# EAGLE board Orbiter_RING_V4_0 (EAGLE 9.0.1)
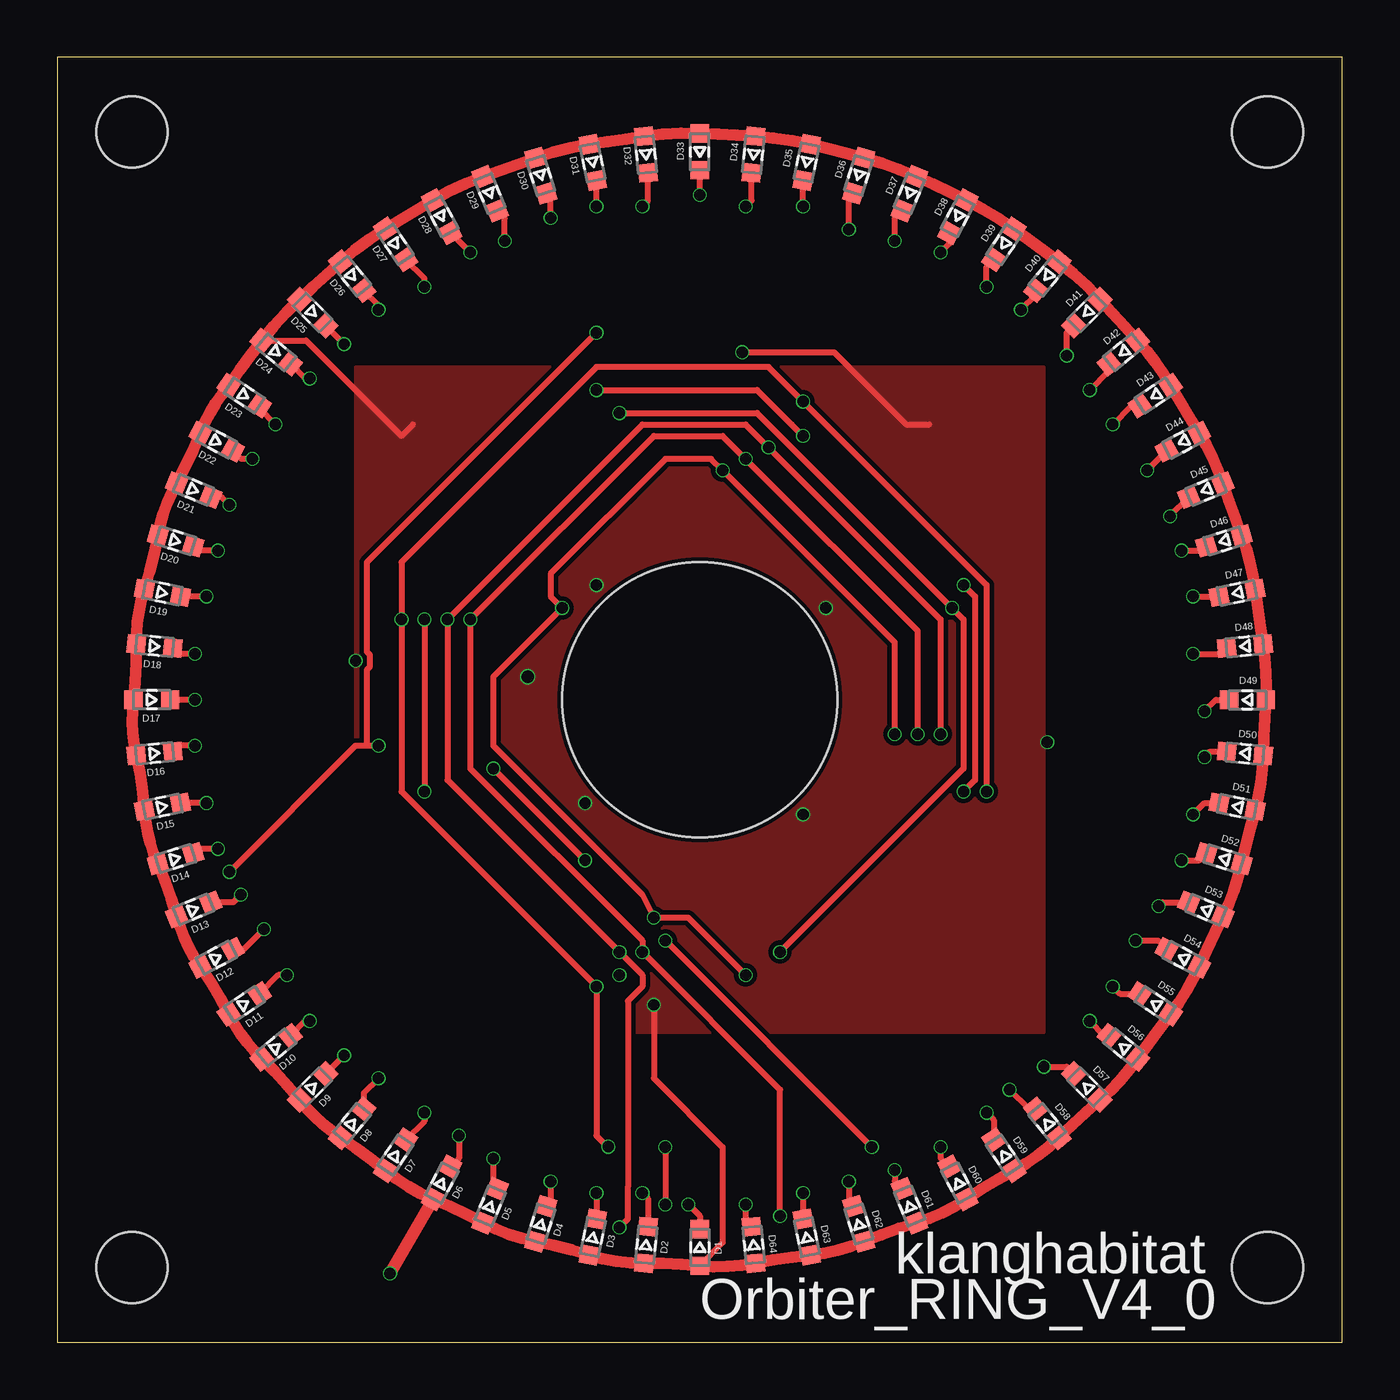
[diagram p0: board, top side]
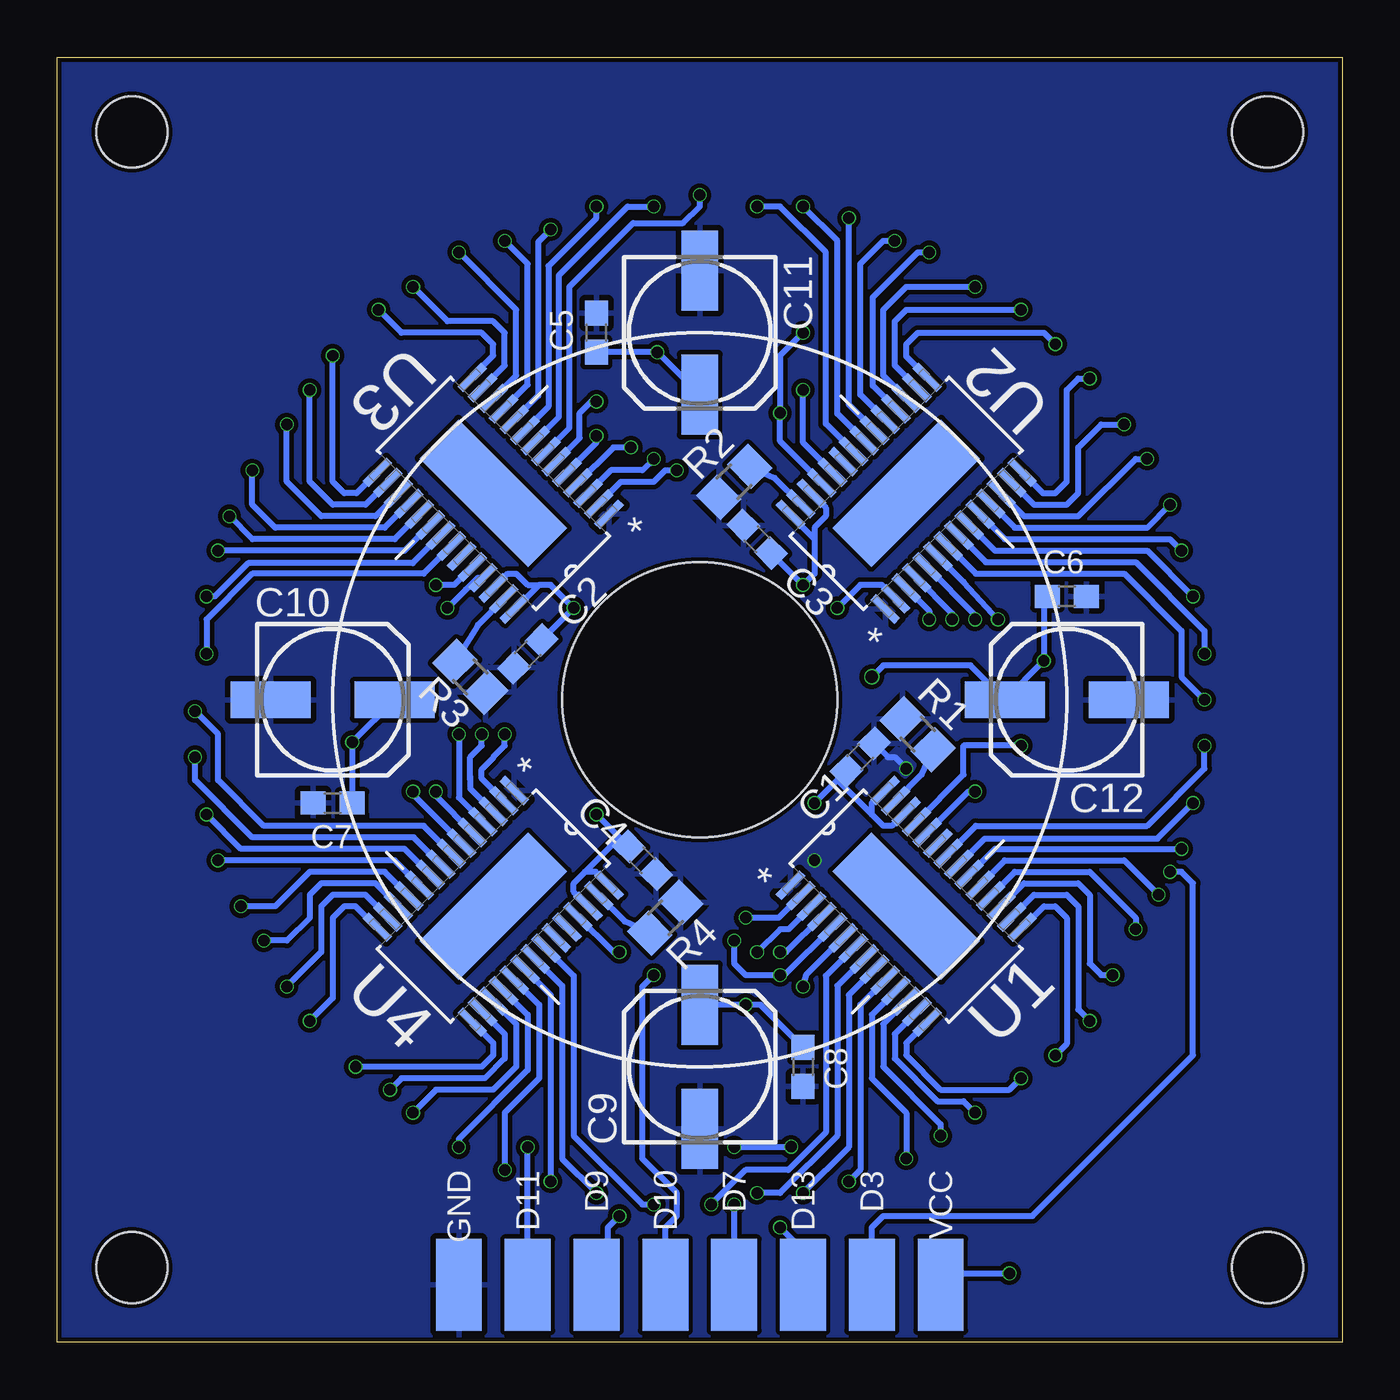
[diagram p1: board, bottom side, seen from below]

Size 56 x 56 mm. Coordinates in mm from the lower left corner, seen from the top.
Outline: 0,0 56,0 56,56 0,56 0,0
Copper layers (1*16): Top 0.035mm / dielectric 1.5mm / Bottom 0.035mm
Design rules "aisler_go_2layer *": minimum track width 0.1mm, minimum drill 0.2mm, track to track 0.2mm, track to pad 0.2mm, pad to pad 0.1mm, via to via 0.1mm, smd to smd 0.1mm, copper to edge 0.2mm, drill to drill 0.21mm, minimum pad ring 0.25mm, minimum via ring 0.05mm, stop-mask expansion 0.01mm, vias tented up to drill 0mil, thermal gap 10mil
Holes 3.1 mm at 3.25,3.25 52.75,52.75 52.75,3.25 3.25,52.75
Holes 12 mm at 28,28

## Footprints (pad centres in the part's own frame; a part is rotated, then mirrored left to right if it is on the bottom)
C0603 = smd 1.1 x 1: 1 -0.85,0; 2 0.85,0
153CLV-0605 = smd 3.5 x 1.6: + 2.7,0; - -2.7,0
WL-SMCW_0603 = smd 0.8 x 0.8: 1 -0.8,0; 2 0.8,0
R0805 = smd 1.3 x 1.5: 1 -0.95,0; 2 0.95,0
SOP65P640X120-29N = smd 1.473 x 0.356: 1 -2.921,4.216; 2 -2.921,3.581; 3 -2.921,2.921; 4 -2.921,2.286; 5 -2.921,1.626; 6 -2.921,0.965; 7 -2.921,0.33; 8 -2.921,-0.33; 9 -2.921,-0.965; 10 -2.921,-1.626; 11 -2.921,-2.286; 12 -2.921,-2.921; 13 -2.921,-3.581; 14 -2.921,-4.216; 15 2.921,-4.216; 16 2.921,-3.581; 17 2.921,-2.921; 18 2.921,-2.286; 19 2.921,-1.626; 20 2.921,-0.965; 21 2.921,-0.33; 22 2.921,0.33; 23 2.921,0.965; 24 2.921,1.626; 25 2.921,2.286; 26 2.921,2.921; 27 2.921,3.581; 28 2.921,4.216 | smd 2.4 x 6.7: THERMAL 0,0
OVAL_PAD = smd 2 x 4: P$1 0,0

## Placement (x,y rotation side)
C1  100n  [C0603]  21,25.5 45 bottom
C2  100n  [C0603]  35.5,30 225 bottom
C3  100n  [C0603]  25.5,35 135 bottom
C4  100n  [C0603]  30.5,21 315 bottom
C5  100n  [C0603]  32.5,44 90 bottom
C6  100n  [C0603]  12,32.5 0 bottom
C7  100n  [C0603]  44,23.5 180 bottom
C8  100n  [C0603]  23.5,12 270 bottom
C9  10u  [153CLV-0605]  28,12 90 bottom
C10  10u  [153CLV-0605]  44,28 0 bottom
C11  10u  [153CLV-0605]  28,44 270 bottom
C12  10u  [153CLV-0605]  12,28 180 bottom
D1  SMD_LED_0603  [WL-SMCW_0603]  28,4.13 270 top
D2  SMD_LED_0603  [WL-SMCW_0603]  25.66,4.24 264.4 top
D3  SMD_LED_0603  [WL-SMCW_0603]  23.34,4.58 258.8 top
D4  SMD_LED_0603  [WL-SMCW_0603]  21.07,5.15 253.1 top
D5  SMD_LED_0603  [WL-SMCW_0603]  18.86,5.94 247.5 top
D6  SMD_LED_0603  [WL-SMCW_0603]  16.75,6.94 241.9 top
D7  SMD_LED_0603  [WL-SMCW_0603]  14.74,8.15 236.3 top
D8  SMD_LED_0603  [WL-SMCW_0603]  12.85,9.54 230.6 top
D9  SMD_LED_0603  [WL-SMCW_0603]  11.12,11.12 225 top
D10  SMD_LED_0603  [WL-SMCW_0603]  9.54,12.85 219.4 top
D11  SMD_LED_0603  [WL-SMCW_0603]  8.15,14.74 213.8 top
D12  SMD_LED_0603  [WL-SMCW_0603]  6.94,16.75 208.1 top
D13  SMD_LED_0603  [WL-SMCW_0603]  5.94,18.86 202.5 top
D14  SMD_LED_0603  [WL-SMCW_0603]  5.15,21.07 196.9 top
D15  SMD_LED_0603  [WL-SMCW_0603]  4.58,23.34 191.3 top
D16  SMD_LED_0603  [WL-SMCW_0603]  4.24,25.66 185.6 top
D17  SMD_LED_0603  [WL-SMCW_0603]  4.12,28 180 top
D18  SMD_LED_0603  [WL-SMCW_0603]  4.24,30.34 174.4 top
D19  SMD_LED_0603  [WL-SMCW_0603]  4.58,32.66 168.8 top
D20  SMD_LED_0603  [WL-SMCW_0603]  5.15,34.93 163.1 top
D21  SMD_LED_0603  [WL-SMCW_0603]  5.94,37.14 157.5 top
D22  SMD_LED_0603  [WL-SMCW_0603]  6.94,39.25 151.9 top
D23  SMD_LED_0603  [WL-SMCW_0603]  8.15,41.26 146.3 top
D24  SMD_LED_0603  [WL-SMCW_0603]  9.54,43.15 140.6 top
D25  SMD_LED_0603  [WL-SMCW_0603]  11.12,44.88 135 top
D26  SMD_LED_0603  [WL-SMCW_0603]  12.85,46.46 129.4 top
D27  SMD_LED_0603  [WL-SMCW_0603]  14.74,47.85 123.8 top
D28  SMD_LED_0603  [WL-SMCW_0603]  16.75,49.06 118.2 top
D29  SMD_LED_0603  [WL-SMCW_0603]  18.86,50.06 112.5 top
D30  SMD_LED_0603  [WL-SMCW_0603]  21.07,50.85 106.9 top
D31  SMD_LED_0603  [WL-SMCW_0603]  23.34,51.42 101.3 top
D32  SMD_LED_0603  [WL-SMCW_0603]  25.66,51.76 95.6 top
D33  SMD_LED_0603  [WL-SMCW_0603]  28,51.88 90 top
D34  SMD_LED_0603  [WL-SMCW_0603]  30.34,51.76 84.4 top
D35  SMD_LED_0603  [WL-SMCW_0603]  32.66,51.42 78.8 top
D36  SMD_LED_0603  [WL-SMCW_0603]  34.93,50.85 73.1 top
D37  SMD_LED_0603  [WL-SMCW_0603]  37.14,50.06 67.5 top
D38  SMD_LED_0603  [WL-SMCW_0603]  39.25,49.06 61.9 top
D39  SMD_LED_0603  [WL-SMCW_0603]  41.26,47.85 56.3 top
D40  SMD_LED_0603  [WL-SMCW_0603]  43.15,46.46 50.6 top
D41  SMD_LED_0603  [WL-SMCW_0603]  44.88,44.88 45 top
D42  SMD_LED_0603  [WL-SMCW_0603]  46.46,43.15 39.4 top
D43  SMD_LED_0603  [WL-SMCW_0603]  47.85,41.26 33.8 top
D44  SMD_LED_0603  [WL-SMCW_0603]  49.06,39.25 28.1 top
D45  SMD_LED_0603  [WL-SMCW_0603]  50.06,37.14 22.5 top
D46  SMD_LED_0603  [WL-SMCW_0603]  50.85,34.93 16.9 top
D47  SMD_LED_0603  [WL-SMCW_0603]  51.42,32.66 11.3 top
D48  SMD_LED_0603  [WL-SMCW_0603]  51.76,30.34 5.6 top
D49  SMD_LED_0603  [WL-SMCW_0603]  51.87,28 0 top
D50  SMD_LED_0603  [WL-SMCW_0603]  51.76,25.66 354.4 top
D51  SMD_LED_0603  [WL-SMCW_0603]  51.42,23.34 348.8 top
D52  SMD_LED_0603  [WL-SMCW_0603]  50.85,21.07 343.1 top
D53  SMD_LED_0603  [WL-SMCW_0603]  50.06,18.86 337.5 top
D54  SMD_LED_0603  [WL-SMCW_0603]  49.06,16.75 331.9 top
D55  SMD_LED_0603  [WL-SMCW_0603]  47.85,14.74 326.3 top
D56  SMD_LED_0603  [WL-SMCW_0603]  46.46,12.85 320.6 top
D57  SMD_LED_0603  [WL-SMCW_0603]  44.88,11.12 315 top
D58  SMD_LED_0603  [WL-SMCW_0603]  43.15,9.54 309.4 top
D59  SMD_LED_0603  [WL-SMCW_0603]  41.26,8.15 303.8 top
D60  SMD_LED_0603  [WL-SMCW_0603]  39.25,6.94 298.1 top
D61  SMD_LED_0603  [WL-SMCW_0603]  37.14,5.94 292.5 top
D62  SMD_LED_0603  [WL-SMCW_0603]  34.93,5.15 286.9 top
D63  SMD_LED_0603  [WL-SMCW_0603]  32.66,4.58 281.3 top
D64  SMD_LED_0603  [WL-SMCW_0603]  30.34,4.24 275.6 top
R1  2k  [R0805]  18.5,26.5 315 bottom
R2  2k  [R0805]  26.5,37.5 45 bottom
R3  2k  [R0805]  38,29 135 bottom
R4  2k  [R0805]  29.5,18.5 225 bottom
U1  TLC5940  [SOP65P640X120-29N]  19,19 45 bottom
U2  TLC5940  [SOP65P640X120-29N]  19,37 135 bottom
U3  TLC5940  [SOP65P640X120-29N]  37,37 225 bottom
U4  TLC5940  [SOP65P640X120-29N]  37,19 315 bottom
U$1  TP  [OVAL_PAD]  17.5,2.5 0 bottom
U$2  TP  [OVAL_PAD]  20.5,2.5 0 bottom
U$3  TP  [OVAL_PAD]  23.5,2.5 0 bottom
U$4  TP  [OVAL_PAD]  26.5,2.5 0 bottom
U$5  TP  [OVAL_PAD]  29.5,2.5 0 bottom
U$6  TP  [OVAL_PAD]  32.5,2.5 0 bottom
U$7  TP  [OVAL_PAD]  35.5,2.5 0 bottom
U$8  TP  [OVAL_PAD]  38.5,2.5 0 bottom

## Library data of the parts
C1-C12 D1-D64 R1-R4 U$1-U$8 = C_Sager_Bibliothek
U1-U4 = C_Sager_Bibliothek; MPN: TLC59401PWP; OC_FARNELL: -; OC_NEWARK: 64R0661; PACKAGE: TSSOP-28; SUPPLIER: Texas Instruments

## Nets
D3/GSCLK: U1.25 U2.25 U3.25 U4.25 U$2.P$1
D7/MODE: U1.6 U2.6 U3.6 U4.6 U$4.P$1
D9/XLAT: U1.3 U2.3 U3.3 U4.3 U$6.P$1
D10/BLANK: U1.2 U2.2 U3.2 U4.2 U$5.P$1
D11/MOSI/SIN: U1.5 U$7.P$1
D13/SCK: U1.4 U2.4 U3.4 U4.4 U$3.P$1
GND: C1.2 C2.2 C3.2 C4.2 C5.2 C6.2 C7.2 C8.2 C9.- C10.- C11.- C12.- R1.1 R2.1 R3.1 R4.1 U1.1 U2.1 U3.1 U4.1 U$8.P$1
IREF_U1: R2.2 U2.27
IREF_U2: R3.2 U3.27
IREF_U3: R4.2 U4.27
IREF_U4: R1.2 U1.27
N$1: D17.1 U2.7
N$2: U1.24 U2.5
N$3: D18.1 U2.8
N$4: D24.1 U2.14
N$5: D19.1 U2.9
N$6: D25.1 U2.15
N$7: D20.1 U2.10
N$8: D26.1 U2.16
N$9: D21.1 U2.11
N$10: D22.1 U2.12
N$11: D23.1 U2.13
N$12: D27.1 U2.17
N$13: D28.1 U2.18
N$14: D29.1 U2.19
N$15: D30.1 U2.20
N$16: D31.1 U2.21
N$17: D32.1 U2.22
N$19: D33.1 U3.7
N$20: D34.1 U3.8
N$21: D35.1 U3.9
N$22: D36.1 U3.10
N$23: D37.1 U3.11
N$24: D38.1 U3.12
N$25: D39.1 U3.13
N$26: D40.1 U3.14
N$27: D41.1 U3.15
N$28: D42.1 U3.16
N$29: D43.1 U3.17
N$31: D44.1 U3.18
N$32: D45.1 U3.19
N$33: D46.1 U3.20
N$34: D47.1 U3.21
N$35: D48.1 U3.22
N$39: D49.1 U4.7
N$40: D50.1 U4.8
N$41: D51.1 U4.9
N$42: D52.1 U4.10
N$43: D53.1 U4.11
N$44: D54.1 U4.12
N$45: D55.1 U4.13
N$46: D56.1 U4.14
N$47: D57.1 U4.15
N$48: D58.1 U4.16
N$49: D59.1 U4.17
N$50: D60.1 U4.18
N$51: D61.1 U4.19
N$52: D62.1 U4.20
N$53: D63.1 U4.21
N$54: D64.1 U4.22
N$58: D1.1 U1.7
N$59: D2.1 U1.8
N$60: D3.1 U1.9
N$61: D4.1 U1.10
N$62: D5.1 U1.11
N$63: D6.1 U1.12
N$64: D7.1 U1.13
N$65: D8.1 U1.14
N$66: D9.1 U1.15
N$67: D10.1 U1.16
N$68: D11.1 U1.17
N$69: D12.1 U1.18
N$70: D13.1 U1.19
N$71: D14.1 U1.20
N$72: D15.1 U1.21
N$73: D16.1 U1.22
SIN_U2: U2.24 U3.5
SIN_U3: U3.24 U4.5
VCC: C1.1 C2.1 C3.1 C4.1 C5.1 C6.1 C7.1 C8.1 C9.+ C10.+ C11.+ C12.+ D1.2 D2.2 D3.2 D4.2 D5.2 D6.2 D7.2 D8.2 D9.2 D10.2 D11.2 D12.2 D13.2 D14.2 D15.2 D16.2 D17.2 D18.2 D19.2 D20.2 D21.2 D22.2 D23.2 D24.2 D25.2 D26.2 D27.2 D28.2 D29.2 D30.2 D31.2 D32.2 D33.2 D34.2 D35.2 D36.2 D37.2 D38.2 D39.2 D40.2 D41.2 D42.2 D43.2 D44.2 D45.2 D46.2 D47.2 D48.2 D49.2 D50.2 D51.2 D52.2 D53.2 D54.2 D55.2 D56.2 D57.2 D58.2 D59.2 D60.2 D61.2 D62.2 D63.2 D64.2 U1.26 U1.28 U2.26 U2.28 U3.26 U3.28 U4.26 U4.28 U$1.P$1

## Tracks (layer width: path | path; a pad name or v marks a point on that pad's centre or on a via)
D3/GSCLK  (via drill 0.5)
  Top 0.254: v24.5,40.5 30.5,40.5 v39,32 39.5,31.5 39.5,25 v31.5,17 | v7.5,20.5 13,26 13.5,26 | 13.5,26 v14,26 | v23.5,44 13.5,34 13.5,30.09 13.63,29.96 13.63,29.44 13.5,29.31 13.5,26
  Bottom 0.254: U2.25 24.5,39.27 v24.5,40.5 24.5,43 v23.5,44 | v39,32 38.19,32.81 38.18,32.81 37.67,33.32 U3.25 | v31.5,17 31.77,17 U4.25 | U1.25 16.5,24.73 16.5,26 v14,26 | 20,3 U$2.P$1 20.5,5 20,5.5 13.5,5.5 6.5,12.5 6.5,20 7,20.5 v7.5,20.5
D7/MODE  (via drill 0.5)
  Top 0.254: v40.5,24 40.5,33 v32.5,41 31,42.5 23.5,42.5 15,34 v15,31.5 15,24 v23.5,15.5 23.5,9 v24,8.5 v24.01,8.51 | v26.5,8.5 v26.5,6
  Bottom 0.254: U3.6 33.23,39.41 33.23,40.5 32.73,41 v32.5,41 | U2.6 16.5,33.13 v15,31.5 | U4.6 40.5,23.86 v40.5,24 | U1.6 23.36,16 v23.5,15.5 | v24.01,8.51 24.03,8.5 v26.5,8.5 | v26.5,6 26.5,4.5 26.5,3 U$4.P$1
D9/XLAT  (via drill 0.5)
  Top 0.254: v37.5,26.5 37.5,31 v30,38.5 29,39.5 26,39.5 v18,31.5 18,25 25.5,17.5 v25.5,17 31.5,11 v31.5,5.5
  Bottom 0.254: U2.3 18,31.87 v18,31.5 | v30,38.5 30.5,38 31.87,38 U3.3 | 38,24.64 38,24.5 | 38,24.5 38.01,24.13 37.51,23.64 U4.3 | v37.5,26.5 37.5,26 38,25.5 38,24.5 | U1.3 24.13,18 24.5,18 v25.5,17 | U$6.P$1 32,3 32,5 v31.5,5.5
D10/BLANK  (via drill 0.5)
  Top 0.254: v36.5,26.5 36.5,30.5 v29,38 28.5,38.5 26.5,38.5 21.5,33.5 21.5,32.5 v22,32 19,29 19,26 25.5,19.5 v26,18.5 27.5,18.5 v30,16
  Bottom 0.254: U2.2 20.07,33 21,33 v22,32 | U3.2 31.43,37.5 30,37.5 29.5,38 v29,38 | U4.2 37.5,24.57 37.5,24.97 37,25.47 37,25.5 36.5,26 v36.5,26.5 | v26,18.5 24.57,18.5 U1.2 | U$5.P$1 29.5,5 29,5.5 29,6.5 30.5,8 30.5,15.5 v30,16
D11/MOSI/SIN  (via drill 0.5)
  Top 0.254: v35.5,8.5 v26.5,17.5
  Bottom 0.254: U1.5 24.3,16 v24.5,16 26,16 26.5,16.5 v26.5,17.5 | U$7.P$1 v35.5,8.5
D13/SCK  (via drill 0.5)
  Top 0.254: v38.5,26.5 38.5,31.5 v31,39 30,40 25.5,40 v17,31.5 17,24.5 v24.5,17 25.5,16 25.5,15.5 24.87,14.87 24.87,6.76 24.87,6.5 24.87,5.37 v24.5,5
  Bottom 0.254: U2.4 17,31.77 v17,31.5 | U3.4 31.77,39 v31,39 | v38.5,26.5 38.5,23.73 U4.4 | U1.4 24.23,17 v24.5,17 | U$3.P$1 23.5,4 v24.5,5
GND  (via drill 0.5)
  Top 0.254: v19,25 v23,21
  Bottom 0.254: C1.2 19.8,25.5 19.5,25.5 v19,25
  pour Bottom: -1.5,57 -1.5,-1.5 57.5,-1.5 57.5,57
IREF_U1
  Bottom 0.254: U2.27 24.74,37.67 R2.2
IREF_U2
  Bottom 0.254: U3.27 37.67,31.26 R3.2
IREF_U3
  Bottom 0.254: U4.27 31.26,18.33 R4.2
IREF_U4
  Bottom 0.254: U1.27 18.33,24.74 R1.2
N$1  (via drill 0.5)
  Top 0.254: v6,28 D17.1
  Bottom 0.254: U2.7 15.97,33.5 9.5,33.5 7,31 7,29 v6,28
N$2  (via drill 0.5)
  Top 0.254: v16,31.5 v16,24
  Bottom 0.254: U2.5 16,31.7 v16,31.5 | U1.24 16.3,24 v16,24
N$3  (via drill 0.5)
  Top 0.254: v6,30 5.3,30 D18.1
  Bottom 0.254: U2.8 15.53,34 9,34 6,31 v6,30
N$4  (via drill 0.5)
  Top 0.254: v11,42 10.8,42 D24.1
  Bottom 0.254: U2.14 13.04,37 12.5,37 12,37.5 12,41.5 11.5,42 v11,42
N$5  (via drill 0.5)
  Top 0.254: v6.5,32.5 D19.1
  Bottom 0.254: U2.9 15.13,34.5 8.5,34.5 v6.5,32.5
N$6  (via drill 0.5)
  Top 0.254: v12.5,43.5 | v12.5,43.5 D25.1
  Bottom 0.254: U2.15 19,42.96 19,43.5 18.5,44 13,44 v12.5,43.5
N$7  (via drill 0.5)
  Top 0.254: v7,34.5 6.11,34.5 D20.1
  Bottom 0.254: U2.10 14.7,35 7.5,35 v7,34.5
N$8  (via drill 0.5)
  Top 0.254: v14,45 14,45.2 D26.1
  Bottom 0.254: U2.16 19.5,42.56 19.5,44.5 19,45 v14,45
N$9  (via drill 0.5)
  Top 0.254: v7.5,36.5 7.17,36.83 D21.1
  Bottom 0.254: U2.11 14.27,35.5 8.5,35.5 v7.5,36.5
N$10  (via drill 0.5)
  Top 0.254: v8.5,38.5 8.02,38.5 D22.1
  Bottom 0.254: U2.12 13.87,36 11.5,36 9,38.5 v8.5,38.5
N$11  (via drill 0.5)
  Top 0.254: v9.5,40 8.82,40.68 D23.1
  Bottom 0.254: U2.13 13.44,36.5 12,36.5 11.5,37 11.5,39 10.5,40 v9.5,40
N$12  (via drill 0.5)
  Top 0.254: v16,46 16,46.37 D27.1
  Bottom 0.254: U2.17 20,42.13 20,45 19,46 v16,46
N$13  (via drill 0.5)
  Top 0.254: v18,47.5 17.14,48.35 D28.1
  Bottom 0.254: v18,47.5 18.5,47.5 20.45,45.55 20.45,42 20.45,41.87 20.45,41.69 U2.18
N$14  (via drill 0.5)
  Top 0.254: v19.5,48 19.5,48.99 D29.1
  Bottom 0.254: U2.19 21,41.3 21,47 20,48 v19.5,48
N$15  (via drill 0.5)
  Top 0.254: v21.5,49 21.5,49.89 D30.1
  Bottom 0.254: U2.20 21.5,40.87 v21.5,49
N$16  (via drill 0.5)
  Top 0.254: v23.5,49.5 D31.1
  Bottom 0.254: U2.21 22,40.47 22,48 v23.5,49.5
N$17  (via drill 0.5)
  Top 0.254: v25.5,49.5 25.74,49.74 D32.1
  Bottom 0.254: U2.22 22.5,40.03 22.5,47.5 24.5,49.5 v25.5,49.5
N$19  (via drill 0.5)
  Top 0.254: v28,50 D33.1
  Bottom 0.254: U3.7 33.68,39.85 33.68,46 30.91,48.78 28.72,48.78 28,49.5 v28,50
N$20  (via drill 0.5)
  Top 0.254: v30,49.5 30.26,49.76 D34.1
  Bottom 0.254: U3.8 34.14,40.33 34.14,46.5 31.14,49.5 v30,49.5
N$21  (via drill 0.5)
  Top 0.254: v32.5,49.5 v32.51,49.51 D35.1
  Bottom 0.254: U3.9 34.59,40.77 34.59,46.91 32.5,49 v32.5,49.5
N$22  (via drill 0.5)
  Top 0.254: v34.5,48.5 34.5,49.89 D36.1
  Bottom 0.254: v34.5,48.5 35.05,47.95 35.05,41.25 U3.10
N$23  (via drill 0.5)
  Top 0.254: D37.1 36.5,48.99 v36.5,48
  Bottom 0.254: U3.11 35.5,41.73 35.5,47 v36.5,48
N$24  (via drill 0.5)
  Top 0.254: v38.5,47.5 38.87,47.87 D38.1
  Bottom 0.254: U3.12 36,42.13 36,45 v38.5,47.5
N$25  (via drill 0.5)
  Top 0.254: v40.5,46 40.5,46.87 D39.1
  Bottom 0.254: U3.13 36.5,42.56 36.5,44 37,44.5 39,44.5 v40.5,46
N$26  (via drill 0.5)
  Top 0.254: v42,45 42.64,45.64 D40.1
  Bottom 0.254: U3.14 37.92,42.08 37,43 37,43.5 37.5,44 41,44 v42,45
N$27  (via drill 0.5)
  Top 0.254: D41.1 44,44 v44,43
  Bottom 0.254: U3.15 42.96,37 43.5,37 44,37.5 v44,43
N$28  (via drill 0.5)
  Top 0.254: v45,41.5 45.84,42.34 D42.1
  Bottom 0.254: U3.16 42.56,36.5 44,36.5 45,37.5 v45,41.5
N$29  (via drill 0.5)
  Top 0.254: v46,40 46.81,40.81 D43.1
  Bottom 0.254: U3.17 42.13,36 44.5,36 46,37.5 v46,40
N$31  (via drill 0.5)
  Top 0.254: v47.5,38 48.35,38.85 D44.1
  Bottom 0.254: U3.18 41.73,35.5 46.5,35.5 47.5,36.5 v47.5,38
N$32  (via drill 0.5)
  Top 0.254: v48.5,36 D45.1
  Bottom 0.254: U3.19 41.3,35 47.5,35 v48.5,36
N$33  (via drill 0.5)
  Top 0.254: v49,34.5 49.89,34.5 D46.1
  Bottom 0.254: U3.20 40.87,34.5 v49,34.5
N$34  (via drill 0.5)
  Top 0.254: v49.5,32.5 D47.1
  Bottom 0.254: U3.21 40.51,33.95 47.69,33.95 49.14,32.5 v49.5,32.5
N$35  (via drill 0.5)
  Top 0.254: v49.5,30 50.7,30 D48.1
  Bottom 0.254: U3.22 40.03,33.5 47.5,33.5 49.5,31.5 v49.5,30
N$39  (via drill 0.5)
  Top 0.254: v50,27.5 50.5,28 D49.1
  Bottom 0.254: U4.7 40.03,22.5 47,22.5 49,24.5 49,26.5 v50,27.5
N$40  (via drill 0.5)
  Top 0.254: v50,25.5 50.24,25.74 D50.1
  Bottom 0.254: U4.8 40.47,22 47.5,22 50,24.5 v50,25.5
N$41  (via drill 0.5)
  Top 0.254: v49.5,23 50,23.5 D51.1
  Bottom 0.254: U4.9 40.87,21.5 48,21.5 v49.5,23
N$42  (via drill 0.5)
  Top 0.254: v49,21 49.78,21 D52.1
  Bottom 0.254: U4.10 41.3,21 v49,21
N$43  (via drill 0.5)
  Top 0.254: v48,19 48.17,19.17 D53.1
  Bottom 0.254: U4.11 41.73,20.5 45,20.5 46.5,19 v48,19
N$44  (via drill 0.5)
  Top 0.254: v47,17.5 47.98,17.5 D54.1
  Bottom 0.254: U4.12 42.13,20 44.5,20 45,19.5 45,18.5 46,17.5 v47,17.5
N$45  (via drill 0.5)
  Top 0.254: v46,15.5 46.32,15.18 D55.1
  Bottom 0.254: U4.13 42.56,19.5 44,19.5 44.5,19 44.5,17 v46,15.5
N$46  (via drill 0.5)
  Top 0.254: v45,14 45.64,13.36 D56.1
  Bottom 0.254: U4.14 42.08,18.08 43,19 43.5,19 44,18.5 44,15 v45,14
N$47  (via drill 0.5)
  Top 0.254: v43,12 44,12 D57.1
  Bottom 0.254: U4.15 37,13.04 37,12.5 37.5,12 v43,12
N$48  (via drill 0.5)
  Top 0.254: v41.5,11 42.34,10.16 D58.1
  Bottom 0.254: U4.16 36.5,13.44 36.5,12.36 37.36,11.5 41,11.5 v41.5,11
N$49  (via drill 0.5)
  Top 0.254: v40.5,10 40.81,9.69 D59.1
  Bottom 0.254: U4.17 36,13.87 36,12 37,11 39.5,11 v40.5,10
N$50  (via drill 0.5)
  Top 0.254: v38.5,8.5 38.5,8.02 D60.1
  Bottom 0.254: U4.18 35.5,14.27 35.5,11.86 38.5,8.86 v38.5,8.5
N$51  (via drill 0.5)
  Top 0.254: v36.5,7.5 36.5,7.01 D61.1
  Bottom 0.254: U4.19 35,14.7 35,11.5 36.5,10 v36.5,7.5
N$52  (via drill 0.5)
  Top 0.254: v34.5,7 34.5,6.11 D62.1
  Bottom 0.254: U4.20 34.5,15.13 v34.5,7
N$53  (via drill 0.5)
  Top 0.254: v32.5,6.5 D63.1
  Bottom 0.254: U4.21 34,15.53 34,8 v32.5,6.5
N$54  (via drill 0.5)
  Top 0.254: v30,6 30,5.3 D64.1
  Bottom 0.254: U4.22 33.5,15.97 33.5,9 30.5,6 v30,6
N$58  (via drill 0.5)
  Top 0.254: v27.5,6 28,5.5 D1.1
  Bottom 0.254: U1.7 22.5,15.97 22.5,9.14 24.14,7.5 26,7.5 v27.5,6
N$59  (via drill 0.5)
  Top 0.254: v25.5,6.5 25.74,6.26 D2.1
  Bottom 0.254: U1.8 22,15.53 22,9 24.5,6.5 v25.5,6.5
N$60  (via drill 0.5)
  Top 0.254: v23.5,6.5 D3.1
  Bottom 0.254: U1.9 21.5,15.13 21.5,8.5 v23.5,6.5
N$61  (via drill 0.5)
  Top 0.254: v21.5,7 21.5,6.11 D4.1
  Bottom 0.254: U1.10 21,14.7 21,7.5 v21.5,7
N$62  (via drill 0.5)
  Top 0.254: v19,8 19,6.84 D5.1
  Bottom 0.254: U1.11 20.5,14.27 20.5,11.5 19,10 v19,8
N$63  (via drill 0.5)
  Top 0.254: v17.5,9 17.5,8.02 D6.1
  Bottom 0.254: U1.12 20,13.87 20,12 17.5,9.5 v17.5,9
N$64  (via drill 0.5)
  Top 0.254: v16,10 16,9.63 D7.1
  Bottom 0.254: U1.13 19.5,13.44 19.5,12.36 17.64,10.5 16.5,10.5 v16,10
N$65  (via drill 0.5)
  Top 0.254: v14,11.5 13.36,10.86 D8.1
  Bottom 0.254: U1.14 19,13.04 19,12.5 17.5,11 14.5,11 v14,11.5
N$66  (via drill 0.5)
  Top 0.254: v12.5,12.5 D9.1
  Bottom 0.254: U1.15 13.92,18.08 13,19 12.5,19 12,18.5 12,13 v12.5,12.5
N$67  (via drill 0.5)
  Top 0.254: v11,14 10.8,14 D10.1
  Bottom 0.254: U1.16 13.44,19.5 12,19.5 11.5,19 11.5,14.5 v11,14
N$68  (via drill 0.5)
  Top 0.254: v10,16 9.63,16 D11.1
  Bottom 0.254: U1.17 13.87,20 11.5,20 11,19.5 11,16.5 10.5,16 v10,16
N$69  (via drill 0.5)
  Top 0.254: v9,18 8.13,17.13 D12.1
  Bottom 0.254: U1.18 14.27,20.5 11,20.5 9,18.5 v9,18
N$70  (via drill 0.5)
  Top 0.254: v8,19.5 7.67,19.17 D13.1
  Bottom 0.254: U1.19 14.7,21 9.5,21 v8,19.5
N$71  (via drill 0.5)
  Top 0.254: v7,21.5 6.11,21.5 D14.1
  Bottom 0.254: U1.20 15.13,21.5 v7,21.5
N$72  (via drill 0.5)
  Top 0.254: v6.5,23.5 D15.1
  Bottom 0.254: v6.5,23.5 8.05,21.95 15.58,21.95 U1.21
N$73  (via drill 0.5)
  Top 0.254: v6,26 5.3,26 D16.1
  Bottom 0.254: U1.22 15.97,22.5 8.5,22.5 6,25 v6,26
SIN_U2  (via drill 0.5)
  Top 0.254: v23.5,41.5 30.5,41.5 32,40 v32.5,39.5
  Bottom 0.254: U2.24 23.5,39.2 v23.5,41.5 | U3.5 32.5,39.2 v32.5,39.5
SIN_U3  (via drill 0.5)
  Top 0.254: v39.5,33 40,32.5 40,24.5 v39.5,24
  Bottom 0.254: U3.24 38.7,33 v39.5,33 | U4.5 39.5,23.8 v39.5,24
VCC  (via drill 0.5, 0.55)
  Top 0.254: D24.2 10.84,43.66 15,39.5 15.5,40 | v29.85,43.15 33.85,43.15 37,40 38,40 | v26,14.7 26,11.5 29,8.5 29,4.33 D1.2
  Top 0.508: D6.2 arc-5 D5.2 arc17 D4.2 arc-6 D3.2 arc17 D2.2 arc-6 D1.2 arc17 D64.2 arc-5 D63.2 arc17 D62.2 arc-6 D61.2 arc17 D60.2 arc-6 D59.2 arc16 D58.2 arc-4 D57.2 arc14 D56.2 arc-2 D55.2 arc13 D54.2 arc-2 D53.2 arc13 D52.2 arc-2 D51.2 arc13 D50.2 arc-2 D49.2 arc13 D48.2 arc-1 D47.2 arc13 D46.2 arc-2 D45.2 arc13 D44.2 arc-2 D43.2 arc12 D42.2 arc0 D41.2 arc11 D40.2 arc1 D39.2 arc9 D38.2 arc2 D37.2 arc9 D36.2 arc2 D35.2 arc10 D34.2 arc1 D33.2 arc10 D32.2 arc0 D31.2 arc11 D30.2 D29.2 arc11 D28.2 D27.2 arc11 D26.2 arc2 D25.2 arc9 D24.2 arc3 D23.2 arc19 D22.2 arc-7 D21.2 arc19 D20.2 arc-7 D19.2 arc19 D18.2 arc-8 D17.2 arc20 D16.2 arc-9 D15.2 arc20 D14.2 arc-9 D13.2 arc21 D12.2 arc-9 D11.2 arc20 D10.2 arc-8 D9.2 arc18 D8.2 arc-6 D7.2 arc17 D6.2 | D6.2 v14.5,3
  Bottom 0.254: U2.26 22.5,36.37 22.5,36 23,35.5 23,35 | 23,35 24.05,36.05 U2.28 | C3.1 24.4,33.9 v23.5,33 23,33.5 23,35 | C5.1 v29.85,43.15 C11.+ | C7.1 v43.15,26.15 C10.+ | U1.26 19.63,22.5 20,22.5 20.5,23 | 20.5,23 20.5,23.5 19.95,24.05 U1.28 | 20.5,23 21.9,24.4 C1.1 v23,23.5 | U4.28 32.54,20.5 33,20.5 | 33,20.5 33.5,20 33.5,19.63 U4.26 | 33,20.5 31.6,21.9 C4.1 v32.5,23 | U3.26 36.37,33.5 36,33.5 35.5,33 35,33 | 35,33 36.05,31.95 U3.28 | C2.1 v33.5,32 34.5,33 35,33 | v32.5,23 | C9.+ v26,14.7 25.35,14.7 C8.1 | C6.1 13,32.35 v13,29.7 C12.+ 16.2,29.5 20,29.5 v20.5,29 | U$1.P$1 17,3 v14.5,3
  pour Top: 13,42.5 13,13.5 43,13.5 43,42.5

## Text on the board
tNames: klanghabitat | Orbiter_RING_V4_0
bNames: VCC | D3 | D13 | D7 | D10 | D9 | D11 | GND